# Altium PCB PCB.PcbDoc
Units mil, origin at the board's own origin, x right, y up, seen from the top; angles counter-clockwise.
Board outline 2000 x 1550 mil, 2 copper layers (Top Layer, Bottom Layer); 18 components, 21 nets, 83 pads, 0 vias.
Unrouted connection lines stored in the file: 3.
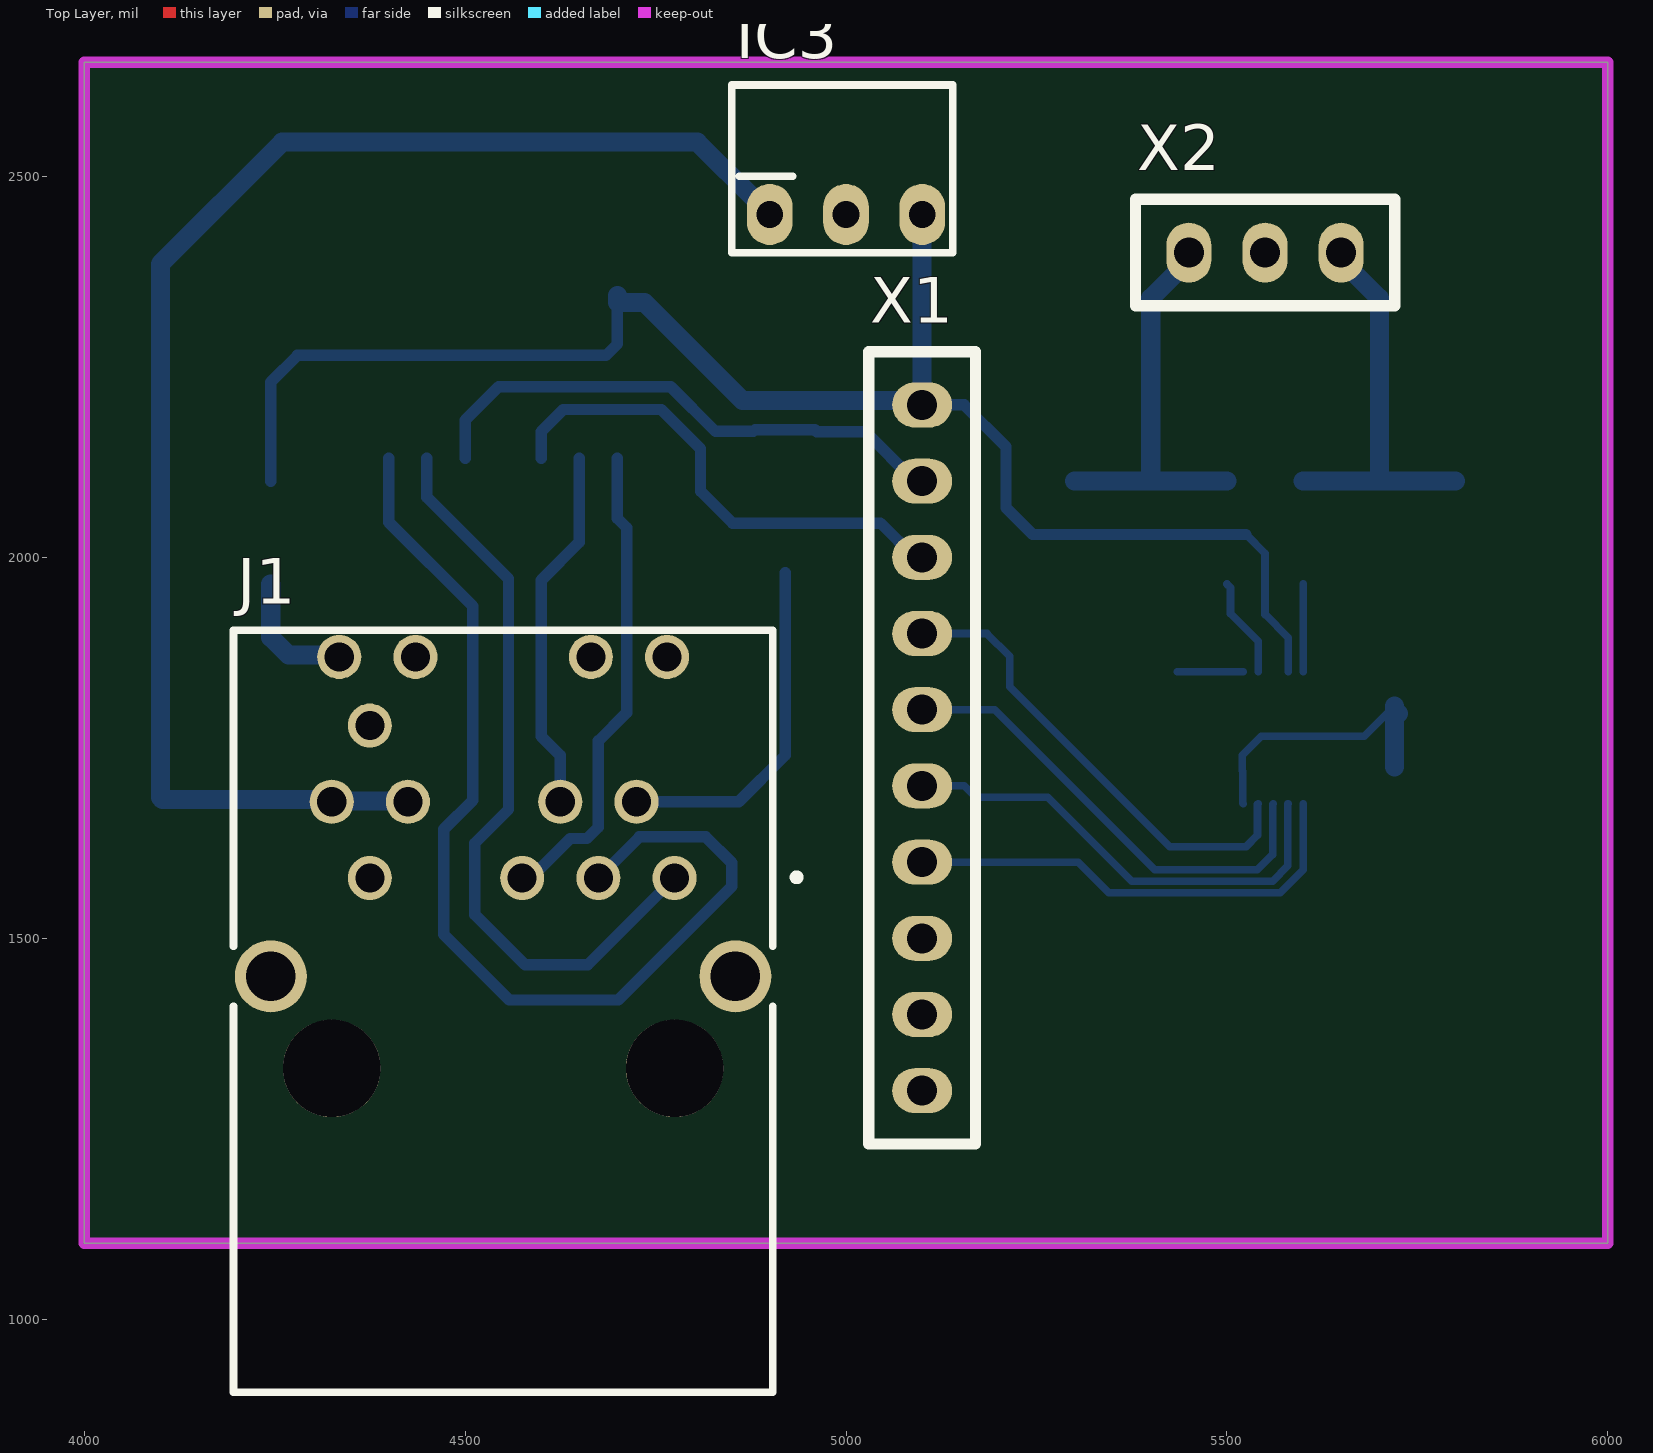
[diagram p0: Top Layer view]
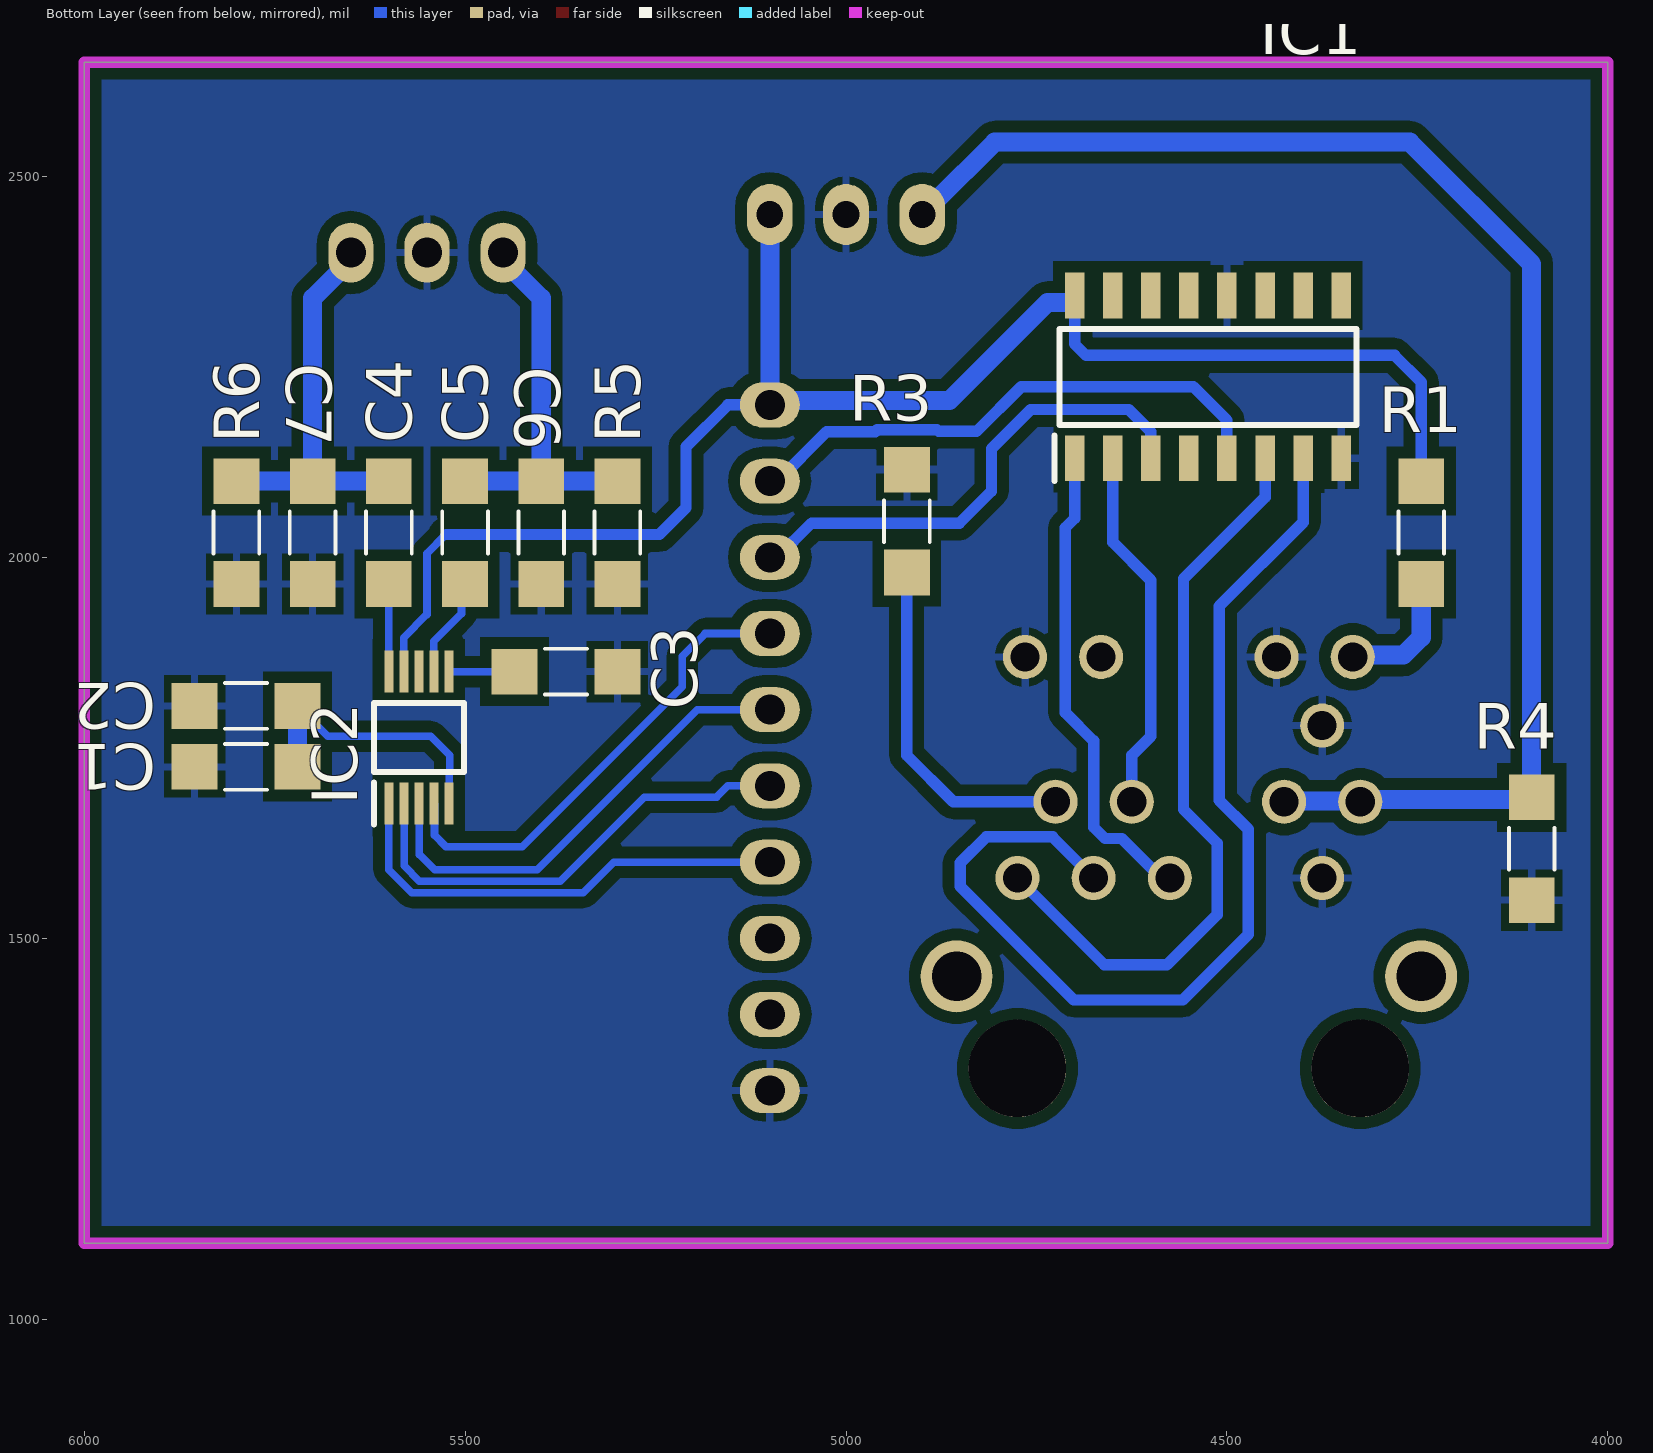
[diagram p1: Bottom Layer view, seen from below]

## Layer stack, top to bottom
Top Solder: solder mask 0.4, Solder Resist, Dk 3.5
Top Layer: signal copper 1.4
Dielectric 1: dielectric 12.6, FR-4, Dk 4.8
Bottom Layer: signal copper 1.4
Bottom Solder: solder mask 0.4, Solder Resist, Dk 3.5

## Board outline
4000,2650 4000,1100 6000,1100 6000,2650

## Design rules (kind name [scope] priority, off if disabled: settings)
Clearance [All] p1: gap=15 ignorepadtopadclearanceinfootprint=FALSE
PolygonConnect [All] p1: connectstyle=Relief reliefconductorwidth=10 reliefentries=4 polygonreliefangle="90 Angle" airgapwidth=10
RoutingVias [All] p1: holewidth=28 width=50 viastyle="Through Hole" minholewidth=28 minwidth=50 maxholewidth=28 maxwidth=50
SolderMaskExpansion [All] p1: expansion=4 istentingtop=FALSE
Width [All] p1: maxlimit=50 minlimit=10 preferedwidth=15 minimp=50.000000 maximp=50.000000 favimp=50.000000
30 further rules are at their usual default settings.

## Components (designator, comment, footprint, x,y, rotation, side; value= is the part's Value field where it differs from the comment)
C1 "100nF" 1206 5855,1725 r180 bottom
C2 "3µ3" 1206 5855,1805 r180 bottom
C3 "10µF" 1206 5435,1850 r180 bottom
C4 "3µ3" 1206 5600,1965 r90 bottom
C5 "3µ3" 1206 5500,1965 r90 bottom
C6 "1nF" 1206 5400,1965 r90 bottom
C7 "1nF" 1206 5700,1965 r90 bottom
IC1 "AM26LV32CD" SOIC127P600X175-16N 4525,2236.77 r90 bottom
IC2 "CS4344-DZZ" SOP50P490X110-10N 5560.63,1763.39 r90 bottom
IC3 "LMO78xx" LMO78xx 5000,2450 r0 top
J1 "SI-52008-F" SI-52007-F_1 4550,1450 r0 top
R1 "330R" 1206 4245,1965 r90 bottom
R3 "0R" 1206 4920,1980 r90 bottom
R4 "2k2" 1206 4100,1550 r90 bottom
R5 "10k" 1206 5300,1965 r90 bottom
R6 "10k" 1206 5800,1965 r90 bottom
X1 "1x10 Header" "1x10 Header" 5100,2100 r270 top
X2 "1x3 Jumper" "1x3 Jumper" 5550,2400 r180 top

## Footprints (in the part's own frame and the unit in brackets; to place one, negate y for a bottom-side part, rotate by r counter-clockwise, add the part's x,y. Pads: shape width x height; smd on the part's side, far side on the other; paste and mask are expansions set on the pad)
"1x3 Jumper" [mm]
  oval 1.5x2 hole 1: 1(-2.54,0) 2(0,0) 3(2.54,0)
  silkscreen extent -4.32,-1.78 4.32,1.78
"1x10 Header" [mm]
  oval 1.5x2 hole 1: 1(-2.54,0) 2(0,0) 3(2.54,0) 4(5.08,0) 5(7.62,0) 6(10.16,0) 7(12.7,0) 8(15.24,0) 9(17.78,0) 10(20.32,0)
  silkscreen extent -4.32,-1.78 22.1,1.78
1206 [mil] "Standard 1206 Device"
  rect 60x60 smd: 1(0,0) 2(135,0)
  silkscreen extent 40,-30 95,30, body extent -15,-25 155,25, height 39
LMO78xx [mil]
  oval 60x80 hole 35: 1(-100,0) 2(0,0) 3(100,0)
  silkscreen extent -150,-50 140,170, body extent -150,-50 140,170, height 433
SI-52007-F_1 [mm]
  round 1.47 hole 0.97: 1(5.715,3.281) 2(4.445,5.821) 3(3.175,3.281) 4(1.905,5.821) 5(0.635,3.281) 6(-3.175,5.821) 7(-4.445,3.281) 8(-5.715,5.821) 9(-4.445,8.361) 10(-5.465,10.651) 11(-2.925,10.651) 12(2.925,10.651) 13(5.465,10.651)
  round 2.4 hole 1.65: 14(7.745,0) 17(-7.745,0)
  round 3.25 hole 3.25: 15(5.715,-3.069) 16(-5.715,-3.069)
  silkscreen extent -8.99,-13.86 9.89,11.54
SOIC127P600X175-16N [mm]
  rect 1.525x0.65 smd: 1(-2.712,4.445) 2(-2.712,3.175) 3(-2.712,1.905) 4(-2.712,0.635) 5(-2.712,-0.635) 6(-2.712,-1.905) 7(-2.712,-3.175) 8(-2.712,-4.445) 9(2.712,-4.445) 10(2.712,-3.175) 11(2.712,-1.905) 12(2.712,-0.635) 13(2.712,0.635) 14(2.712,1.905) 15(2.712,3.175) 16(2.712,4.445)
  silkscreen extent -3.47,-4.95 1.6,5.12, body extent -10,-3.38 10,3.38, height 5.8
SOP50P490X110-10N [mm]
  rect 1.4x0.3 smd: 1(-2.2,1) 2(-2.2,0.5) 3(-2.2,0) 4(-2.2,-0.5) 5(-2.2,-1) 6(2.2,-1) 7(2.2,-0.5) 8(2.2,0) 9(2.2,0.5) 10(2.2,1)
  silkscreen extent -2.9,-1.5 1.15,1.5, body extent -10,-3.38 10,3.38, height 5.8

## Part data
C1 C2 C3 C4 C5 C6 C7: library part 1206_C_1nF/63V, "1206_C", Text Field1=06-23225
IC1: "Low-Voltage High-Speed Quadruple Differential Line Receiver", Manufacturer_Name="Texas Instruments", Mouser Part Number=595-AM26LV32CD, Datasheet Link=http://www.ti.com/lit/ds/symlink/am26lv32.pdf, Geometry.Height=1.75mm, Manufacturer_Part_Number=AM26LV32CD, Mouser Price/Stock=https://www.mouser.co.uk/ProductDetail/Texas-Instruments/AM26LV32CD?qs=OorDGPQ79Er6PFoDaOtIRQ%3D%3D
IC2: "Audio D/A Converter ICs Stereo DAC 24-Bit 192kHz", Manufacturer_Name="Cirrus Logic", Mouser Part Number=777-CS4344-DZZ, Datasheet Link=https://statics.cirrus.com/pubs/proDatasheet/CS4344-45-48_F2.pdf, Geometry.Height=1.1mm, Manufacturer_Part_Number=CS4344-DZZ, Mouser Price/Stock=https://www.mouser.co.uk/ProductDetail/Cirrus-Logic/CS4344-DZZ?qs=bUPhaerQQeHBMG5ERFq6kw%3D%3D
J1: "Magjack 10BASE T POE with LEDS Bel-Stewart RJ Socket Module, STP, Straight", Manufacturer_Name=BelFuse, Mouser Part Number=530-SI-52008-F, Datasheet Link=https://componentsearchengine.com/Datasheets/1/SI-52008-F.pdf, Manufacturer_Part_Number=SI-52008-F, Mouser Price/Stock=https://www.mouser.com/Search/Refine.aspx?Keyword=530-SI-52008-F
R1 R3 R4 R5 R6: library part 1206_R, "1206_R"

## Nets (pads, with @x,y where several pads share a name; then routed paths per layer and width w, separated by ;. In a path a pad name is that pad's centre, name@x,y a point inside that pad or via, vN(x,y) a via of type N, cw(c..) or ccw(c..) an arc to the next point about the centre after c; other vN are vias at no path point)
3V3: IC1.16 IC2.9 IC3.3 R1.2 X1.1 | length 2129.1
  Bottom Layer w10: 5525,2030 5550,2005 5550,1925 5580.31,1894.69 IC2.9
  Bottom Layer w15: R1.2 4245,2230 4280,2265 4685,2265 4700,2280 IC1.16 ; X1.1 5155,2200 5210,2145 5210,2065 5245,2030 5525,2030
  Bottom Layer w25: IC1.16 4700,2334.64 4700.3,2334.35 4735.65,2334.35 4864,2206 5094,2206 X1.1 IC3.3
+15V: IC3.1 J1.6 J1.8 R4.2 | length 1934
  Bottom Layer w25: J1.6 4424.17,1680 4325.83,1680 J1.8 4322.09,1682.09 4102.91,1682.09 R4.2 4100,2385 4260,2545 4805,2545 4883.3,2466.7 4883.83,2466.7 4900,2450.53 IC3.1
Ch1-8_Out: IC1.5 X1.2 | length 721.4
  Bottom Layer w15: IC1.5 4500,2180 4544,2224 4770.05,2224 4828.76,2165.29 4878.47,2165.29 4880.68,2167.5 4959.32,2167.5 4961.82,2165 5025.16,2165 5090.16,2100 X1.2
Ch1-8_TD+: IC1.6 J1.1 | length 1002.3
  Bottom Layer w15: IC1.6 4450,2079 4557,1972 4557,1669 4513,1625 4513,1531 4579,1465 4660.83,1465 J1.1 J1.1@4775,1575
Ch1-8_TD-: IC1.7 J1.3 | length 1414.3
  Bottom Layer w15: IC1.7 4400,2046 4510,1936 4510,1681 4472,1643 4472,1505 4558,1419 4701,1419 4850,1568 4850,1599 4816,1633 4728.83,1633 J1.3 J1.3@4667.74,1571.91
Ch9-16_Out: IC1.3 X1.3 | length 660
  Bottom Layer w15: IC1.3 4600,2165 4629,2194 4757.62,2194 4809,2142.62 4809,2087 4851,2045 5045.16,2045 5090.16,2000 X1.3
Ch9-16_TD+: IC1.2 J1.4 | length 490.7
  Bottom Layer w15: J1.4@4627.09,1688.69 4625,1690.77 4625,1740 4600,1765 4600,1970 4650,2020 IC1.2
  Bottom Layer w25: J1.4@4620,1684.17 J1.4 4625,1686.6 J1.4@4627.09,1688.69
Ch9-16_TD-: IC1.1 J1.5 | length 632
  Bottom Layer w15: J1.5 4586.17,1579.17 4638,1631 4660,1631 4675,1646 4675,1759 4712,1796 4712,2039 4700,2051 IC1.1
COM: J1.2 R3.1 | length 460.2
  Bottom Layer w15: J1.2 4859.17,1679.17 4920,1740 R3.1
GND: C1.1 C2.1 C3.2 C6.1 C7.1 IC1.8 IC1.12 IC2.8 IC3.2 J1.7 J1.9 J1.11 J1.13 R3.2 R4.1 R5.1 R6.1 X1.10 X2.2
LRCK: IC2.3 X1.5 | length 622.3
  Bottom Layer w10: X1.5 5195,1800 5405,1590 5540,1590 5560,1610 5560,1676.14 IC2.3
MCLK: IC2.4 X1.4 | length 627.8
  Bottom Layer w10: X1.4 5185,1900 5215,1870 5215,1830 5425,1620 5525,1620 5540.04,1635.04 5540.04,1675.87 IC2.4
NetC1_2: C1.2 C2.2 IC2.5 | length 372.7
  Bottom Layer w10: IC2.5 5520.51,1677.52 5520.51,1719.33 5520,1719.84 5520,1740 5545,1765 5680,1765 5715,1800 5720,1800 C2.2@5725,1795
  Bottom Layer w25: C1.2 5720,1790 C2.2@5725,1795 ; C2.2@5720,1800 C2.2
NetC3_1: C3.1 IC2.6 | length 86.3
  Bottom Layer w10: C3.1 IC2.6
NetC4_1: C4.1 IC2.10 | length 115
  Bottom Layer w10: IC2.10 C4.1
NetC4_2: C4.2 C7.2 R6.2 X2.1 | length 520.7
  Bottom Layer w25: C4.2 C7.2 ; X2.1 5650,2390.16 5700,2340.16 C7.2 ; R6.2 C7.2
NetC5_1: C5.1 IC2.7 | length 132
  Bottom Layer w10: C5.1 5504.72,1960.28 5504.72,1925.86 5540.94,1889.64 IC2.7
NetC5_2: C5.2 C6.2 R5.2 X2.3 | length 520.7
  Bottom Layer w25: R5.2 C6.2 ; X2.3 5450,2390.16 5400,2340.16 C6.2 ; C5.2 C6.2
NetJ1_10: J1.10 R1.1 | length 173.5
  Bottom Layer w25: R1.1 4245,1895 4268.41,1871.59 4332.58,1871.59 J1.10 J1.10@4332.68,1867.17
SCLK: IC2.2 X1.6 | length 622
  Bottom Layer w10: X1.6 5155,1700 5170,1685 5265,1685 5375,1575 5560,1575 5580,1595 5580,1676.46 IC2.2
SDIN: IC2.1 X1.7 | length 615.8
  Bottom Layer w10: X1.7 5305,1600 5345,1560 5570,1560 5600,1590 IC2.1
pads on no net: IC1.4 IC1.9 IC1.10 IC1.11 IC1.13 IC1.14 IC1.15 J1.12 J1.14 J1.15 J1.16 J1.17 X1.8 X1.9
copper on no net: | length 11.6
  Bottom Layer w15: 4656.95,1877.53 4665.16,1869.33

## Polygon pours and split planes (outlines as drawn)
GND on Bottom Layer "GND_L02_P000" (solid, remove dead copper, pour order 0): 4000,2650 4000,1100 6000,1100 6000,2650

## Keep-outs
Keep-Out Layer:
  the board outline again, w15